# Altium PCB Hotbox.PcbDoc
Units mil, origin at the board's own origin, x right, y up, seen from the top; angles counter-clockwise.
Board outline 3270 x 1540 mil, 2 copper layers (Top Layer, Bottom Layer); 6 components, 13 nets, 62 pads, 0 vias.
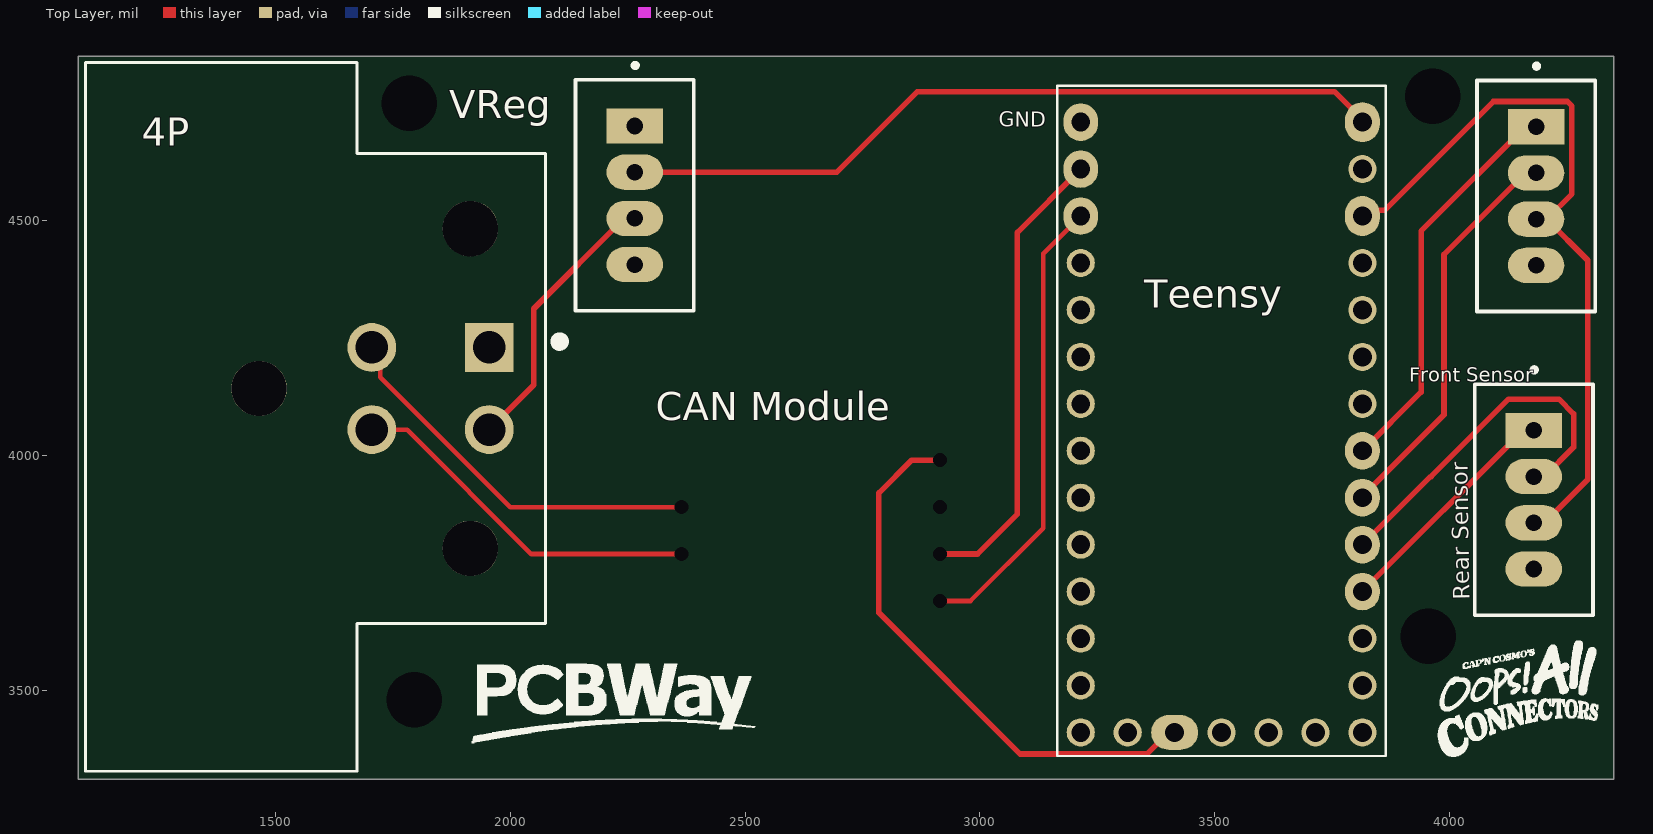
[diagram p0: Top Layer view]
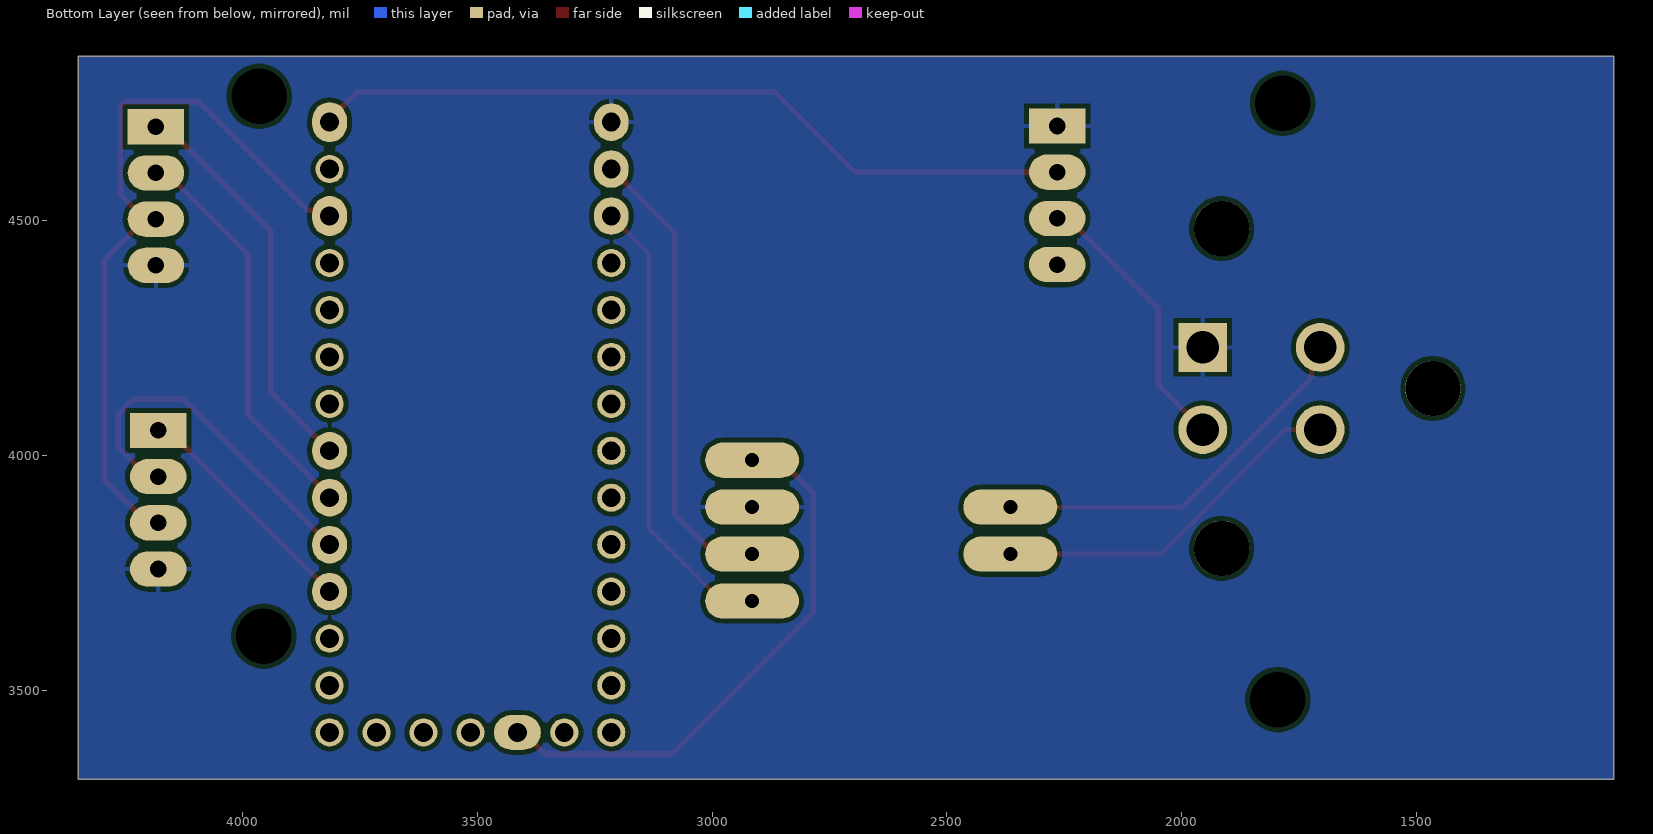
[diagram p1: Bottom Layer view, seen from below]
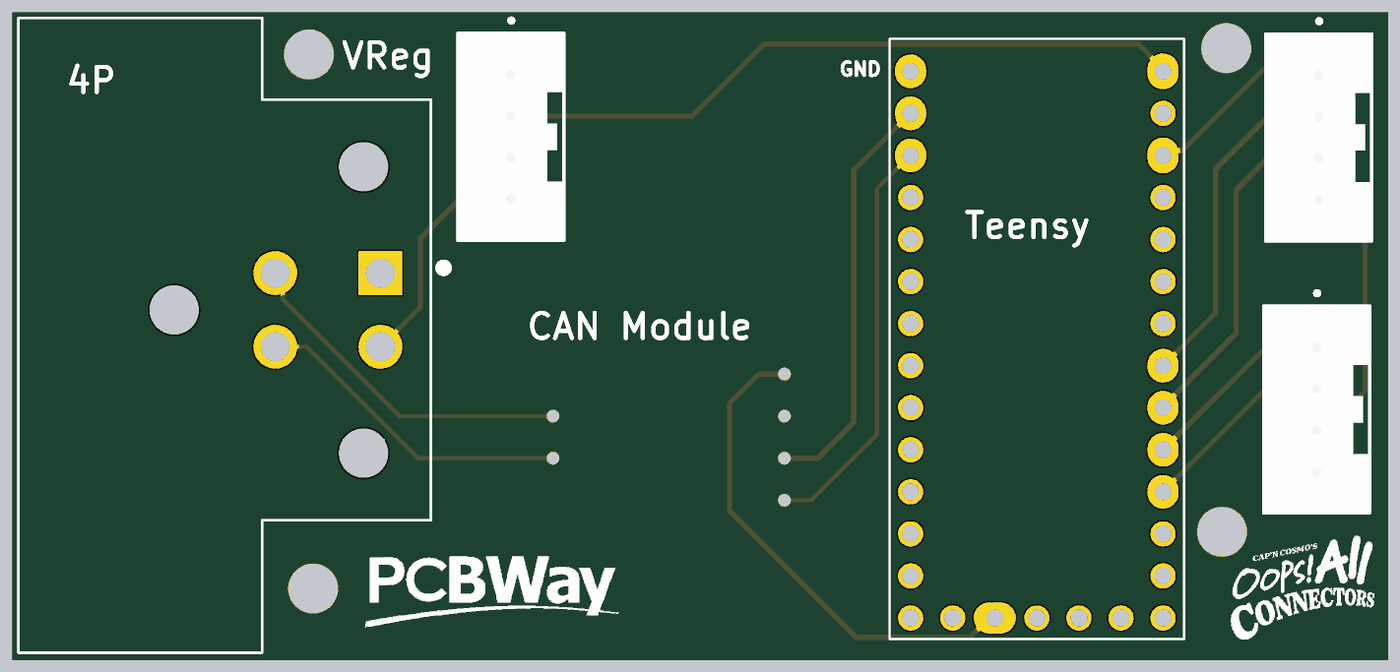
[diagram p2: 3D render of the assembled board from above, using the file's embedded part models]

## Layer stack, top to bottom
Top Solder: solder mask 0.4, Solder Resist, Dk 3.5
Top Layer: signal copper 1.4
Dielectric 1: dielectric 12.6, FR-4, Dk 4.8
Bottom Layer: signal copper 1.4
Bottom Solder: solder mask 0.4, Solder Resist, Dk 3.5

## Board outline
1080,3310 1080,4850 4350,4850 4350,3310

## Design rules (kind name [scope] priority, off if disabled: settings)
Clearance [All] p1: gap=10 ignorepadtopadclearanceinfootprint=FALSE
HoleSize [All] p1: absolutevalues=TRUE maxlimit=200 minlimit=1 maxpercent=80.000 minpercent=20.000
PolygonConnect [All] p1: connectstyle=Relief reliefconductorwidth=10 reliefentries=4 polygonreliefangle="90 Angle" airgapwidth=10
RoutingVias [All] p1: holewidth=28 width=50 viastyle="Through Hole" minholewidth=28 minwidth=50 maxholewidth=28 maxwidth=50
SolderMaskExpansion [All] p1: expansion=4 istentingtop=FALSE
SupplyNets "Schematic Supply Nets" [InNet('GND')] p1: voltage=0.000
Width [All] p1: maxlimit=20 minlimit=10 preferedwidth=12 minimp=50.000000 maximp=50.000000 favimp=50.000000
29 further rules are at their usual default settings.

## Components (designator, comment, footprint, x,y, rotation, side; value= is the part's Value field where it differs from the comment)
4P "DT13-4P" TE_DT13-4P 1705,4142.6 r0 top
"CAN Module" "CAN Module" "CAN Module-Footprint-1" 2915,3990 r180 top
"Front Sensor" "B04B-XASK-1(LF)(SN)" FP-B04B-XASK-1_LF_SN-MFG 4185,4552.64 r90 top
"Rear Sensor" "B04B-XASK-1(LF)(SN)" FP-B04B-XASK-1_LF_SN-MFG 4180,3905.79 r90 top
Teensy "DEV-15583" MODULE_DEV-15583 3515,4060 r0 top
VReg "B04B-XASK-1(LF)(SN)" FP-B04B-XASK-1_LF_SN-MFG 2265,4554.21 r90 top

## Footprints (in the part's own frame and the unit in brackets; to place one, negate y for a bottom-side part, rotate by r counter-clockwise, add the part's x,y. Pads: shape width x height; smd on the part's side, far side on the other; paste and mask are expansions set on the pad)
"CAN Module-Footprint-1" [mil]
  round 0 / inner round 60 / far side oval 200x75 hole 30: 1(0,300) 2(0,200) 3(0,100) 4(0,0) 5(550,200) 6(550,100)
FP-B04B-XASK-1_LF_SN-MFG [mm]
  rect 1.908x3.051 hole 0.9 paste-2539.97 mask+0: 1(3.75,0)
  oval 1.908x3.051 hole 0.9 paste-2539.97 mask+0: 2(1.25,0) 3(-1.25,0) 4(-3.75,0)
  silkscreen extent -6.25,-3.2 7.15,3.2, body extent -6.35,-3.3 6.35,3.3, height 0.25
MODULE_DEV-15583 [mil]
  oval 74x80 hole 40.16: 0(-300,550) 1(-300,450) 16(300,-350) 17(300,-250) 18(300,-150) 19(300,-50) G1(-300,650)
  round 60 hole 40.16: 2(-300,350) 3(-300,250) 4(-300,150) 5(-300,50) 6(-300,-50) 7(-300,-150) 8(-300,-250) 9(-300,-350) 10(-300,-450) 11(-300,-550) 13(300,-650) 14(300,-550) 15(300,-450) 20(300,50) 21(300,150) 22(300,250) 23(300,350) G2(0,-650) G3(300,550) ON-OFF(200,-650) PGM(100,-650) VBAT(-200,-650)
  oval 100x74 hole 40.16: 3.3V_1(-100,-650)
  oval 74x85 hole 40.16: 3.3V_2(300,450) VIN(300,650)
  round 60 hole 40.16 paste+0: 12(-300,-650)
  silkscreen extent -350,-700 350,728
TE_DT13-4P [mm]
  rect 2.64x2.64 hole 1.76: 1(6.35,2.225)
  round 2.64 hole 1.76: 2(6.35,-2.225) 3(0,-2.225) 4(0,2.225)
  round 2.99 hole 2.99 unplated: ""(-6.1,0) ""(5.33,-8.65) ""(5.33,8.65)
  silkscreen extent -15.5,-20.71 10.41,17.64

## Part data
4P: "DT13 Series, 4.44mm Pitch 4 Way 2 Row Right Angle PCB Header, Solder Termination", Package=None, Availability=Unavailable, MF="TE Connectivity", MP=DT13-4P, Price=None, SnapEDA_Link=https://www.snapeda.com/parts/DT13-4P/TE%20Connectivity%20Deutsch%20Connectors/view-part/2708791/?ref=snap, TE_purchase_URL=https://www.te.com/usa-en/product-DT13-4P.html?te_bu=Cor&te_type=disp&te_campaign=seda_glo_cor-seda-global-disp-prtnr-fy19-seda-model-bom-cta_sma-317_1&elqCampaignId=32493
"CAN Module": library part CMP-00030-00003-1, "CAN waveshare"
"Front Sensor" "Rear Sensor" VReg: library part CMP-17439-000018-1, "CONN HEADER VERT 4POS 2.5MM", Current Rating=3A, Manufacturer=JST, Temperature="-25°C to +85°C", Temperature Range High=+85°C, Temperature Range Low=-25°C, Voltage Rating=250V, Automotive=No, Category=Conn, ComponentLink2Description=Datasheet, ComponentLink2URL=http://www.jst-mfg.com/product/pdf/eng/eXA1.pdf, Conn Gender=Male, Conn Orientation=Straight, Contact Material=Tin,Copper, Device Class L1=Connectors, Device Class L2="Headers and Wire Housings", Device Class L3=unset, Digikey Description="CONN HEADER VERT 4POS 2.5MM", Height=8.8mm, Lead Free=Yes, Manufacturer Part Number=B04B-XASK-1(LF)(SN), Number of Contacts=4, Number of Rows=1, Octopart=https://octopart.com/b04b-xask-1%28lf%29%28sn%29-jst-3990149, Package=B04B-XASK-1(LF)(SN), Pitch=2.5mm, RoHS=TRUE
Teensy: "RT1062 Teensy 4.0 i.MX ARMÂ® CortexÂ®-M7 MPU Embedded Evaluation Board", Package=None, Digi-Key_Part_Number=1568-DEV-15583-ND, Digi-Key_Purchase_URL=https://www.digikey.com/product-detail/en/sparkfun-electronics/DEV-15583/1568-DEV-15583-ND/10384551?utm_source=snapeda&utm_medium=aggregator&utm_campaign=symbol, MF="SparkFun Electronics", MP=DEV-15583, SnapEDA_Link=https://www.snapeda.com/parts/DEV-15583/SparkFun%20Electronics/view-part/4001229/?ref=snap

## Free pads (board coordinates)
  round 0 hole 118.11: 1(1785,4750) 1(1795,3480) 1(3955,3615) 1(3965,4765)

## Nets (pads, with @x,y where several pads share a name; then routed paths per layer and width w, separated by ;. In a path a pad name is that pad's centre, name@x,y a point inside that pad or via, vN(x,y) a via of type N, cw(c..) or ccw(c..) an arc to the next point about the centre after c; other vN are vias at no path point)
GND: 4P.1 "CAN Module.3" "Front Sensor.4" "Rear Sensor.4" Teensy.G1 VReg.1
Net4P_2: 4P.2 VReg.3 | length 591.6
  Top Layer w12: 4P.2 2050,4150 2050,4312.5 2242.5,4505 VReg.3
Net4P_3: 4P.3 "CAN Module.5" | length 769.8
  Top Layer w10: 4P.3 1780,4055 2045,3790 2365,3790
Net4P_4: 4P.4 "CAN Module.6" | length 827.4
  Top Layer w10: 4P.4 1722.97,4212.22 1722.97,4167.03 2000,3890 2365,3890
"NetCAN Module_1": "CAN Module.1" Teensy.1 | length 982.3
  Top Layer w10: 2915,3690 2980,3690 3135,3845 3135,4430 Teensy.1
"NetCAN Module_2": "CAN Module.2" Teensy.0 | length 991.1
  Top Layer w12: 2915,3790 2995,3790 3080,3875 3080,4475 Teensy.0
"NetCAN Module_4": "CAN Module.4" Teensy.3.3V_1 | length 1187.7
  Top Layer w12: 2915,3990 2855,3990 2785,3920 2785,3665 3086,3364 3356,3364 3402,3410 Teensy.3.3V_1
"NetFront Sensor_1": "Front Sensor.1" Teensy.19 | length 856.7
  Top Layer w12: Teensy.19 3940,4135 3940,4477.78 4162.5,4700.28 4185,4700.28
"NetFront Sensor_2": "Front Sensor.2" Teensy.18 | length 858.3
  Top Layer w12: Teensy.18 3815,3913 3988.64,4086.64 3988.64,4427.99 4162.5,4601.85 4185,4601.85
"NetFront Sensor_3": "Front Sensor.3" "Rear Sensor.3" Teensy.3.3V_2 | length 1580.6
  Top Layer w12: Teensy.3.3V_2 3827.14,4522.14 3862.14,4522.14 4093.83,4753.83 4251.69,4753.83 4261.06,4744.46 4261.06,4556.98 4207.5,4503.43 ; 4180,3856.57 4202.5,3856.57 4295,3949.07 4295,4415.93 4207.5,4503.43 ; 4185,4503.43 4207.5,4503.43
"NetRear Sensor_1": "Rear Sensor.1" Teensy.16 | length 507.8
  Top Layer w12: Teensy.16 3815,3710.93 4157.5,4053.43 4180,4053.43
"NetRear Sensor_2": "Rear Sensor.2" Teensy.17 | length 773.4
  Top Layer w12: Teensy.17 3960,3955 3961.33,3955 4126.33,4120 4233.67,4120 4265,4088.67 4265,4017.5 4202.5,3955 4180,3955
NetTeensy_VIN: Teensy.VIN VReg.2 | length 1651.2
  Top Layer w12: VReg.2 2695.52,4603.43 2867.09,4775 3755.5,4775 3815,4715.5 Teensy.VIN
pads on no net: 4P. Teensy.2 Teensy.3 Teensy.4 Teensy.5 Teensy.6 Teensy.7 Teensy.8 Teensy.9 Teensy.10 Teensy.11 Teensy.12 Teensy.13 Teensy.14 Teensy.15 Teensy.20 Teensy.21 Teensy.22 Teensy.23 Teensy.G2 Teensy.G3 Teensy.ON-OFF Teensy.PGM Teensy.VBAT VReg.4

## Polygon pours and split planes (outlines as drawn)
GND on Bottom Layer "GND" (solid, pour order 1): 4350,3310 4350,4850 1080,4850 1080,3310

## Silkscreen, mask and mechanical layers (free items; w line width, h text height)
Top Overlay:
  drawing of 35 lines, arcs and shapes, not listed

## Text inside footprints (layer, text, board x,y; h text height)
Teensy: Top Overlay "GND" at 3040,4700 h32; Mechanical 13 "GND" at 3040,4700 h32